# Altium PCB CarrierBoardreal.PcbDoc (part 1 of 2)
Units mm, origin at the board's own origin, x right, y up, seen from the top; angles counter-clockwise.
Board outline 78.61 x 85.6 mm, 2 copper layers (Top Layer, Bottom Layer), stack 1.6 mm thick; 58 components, 54 nets, 254 pads, 94 vias.
Unrouted connection lines stored in the file: 44.
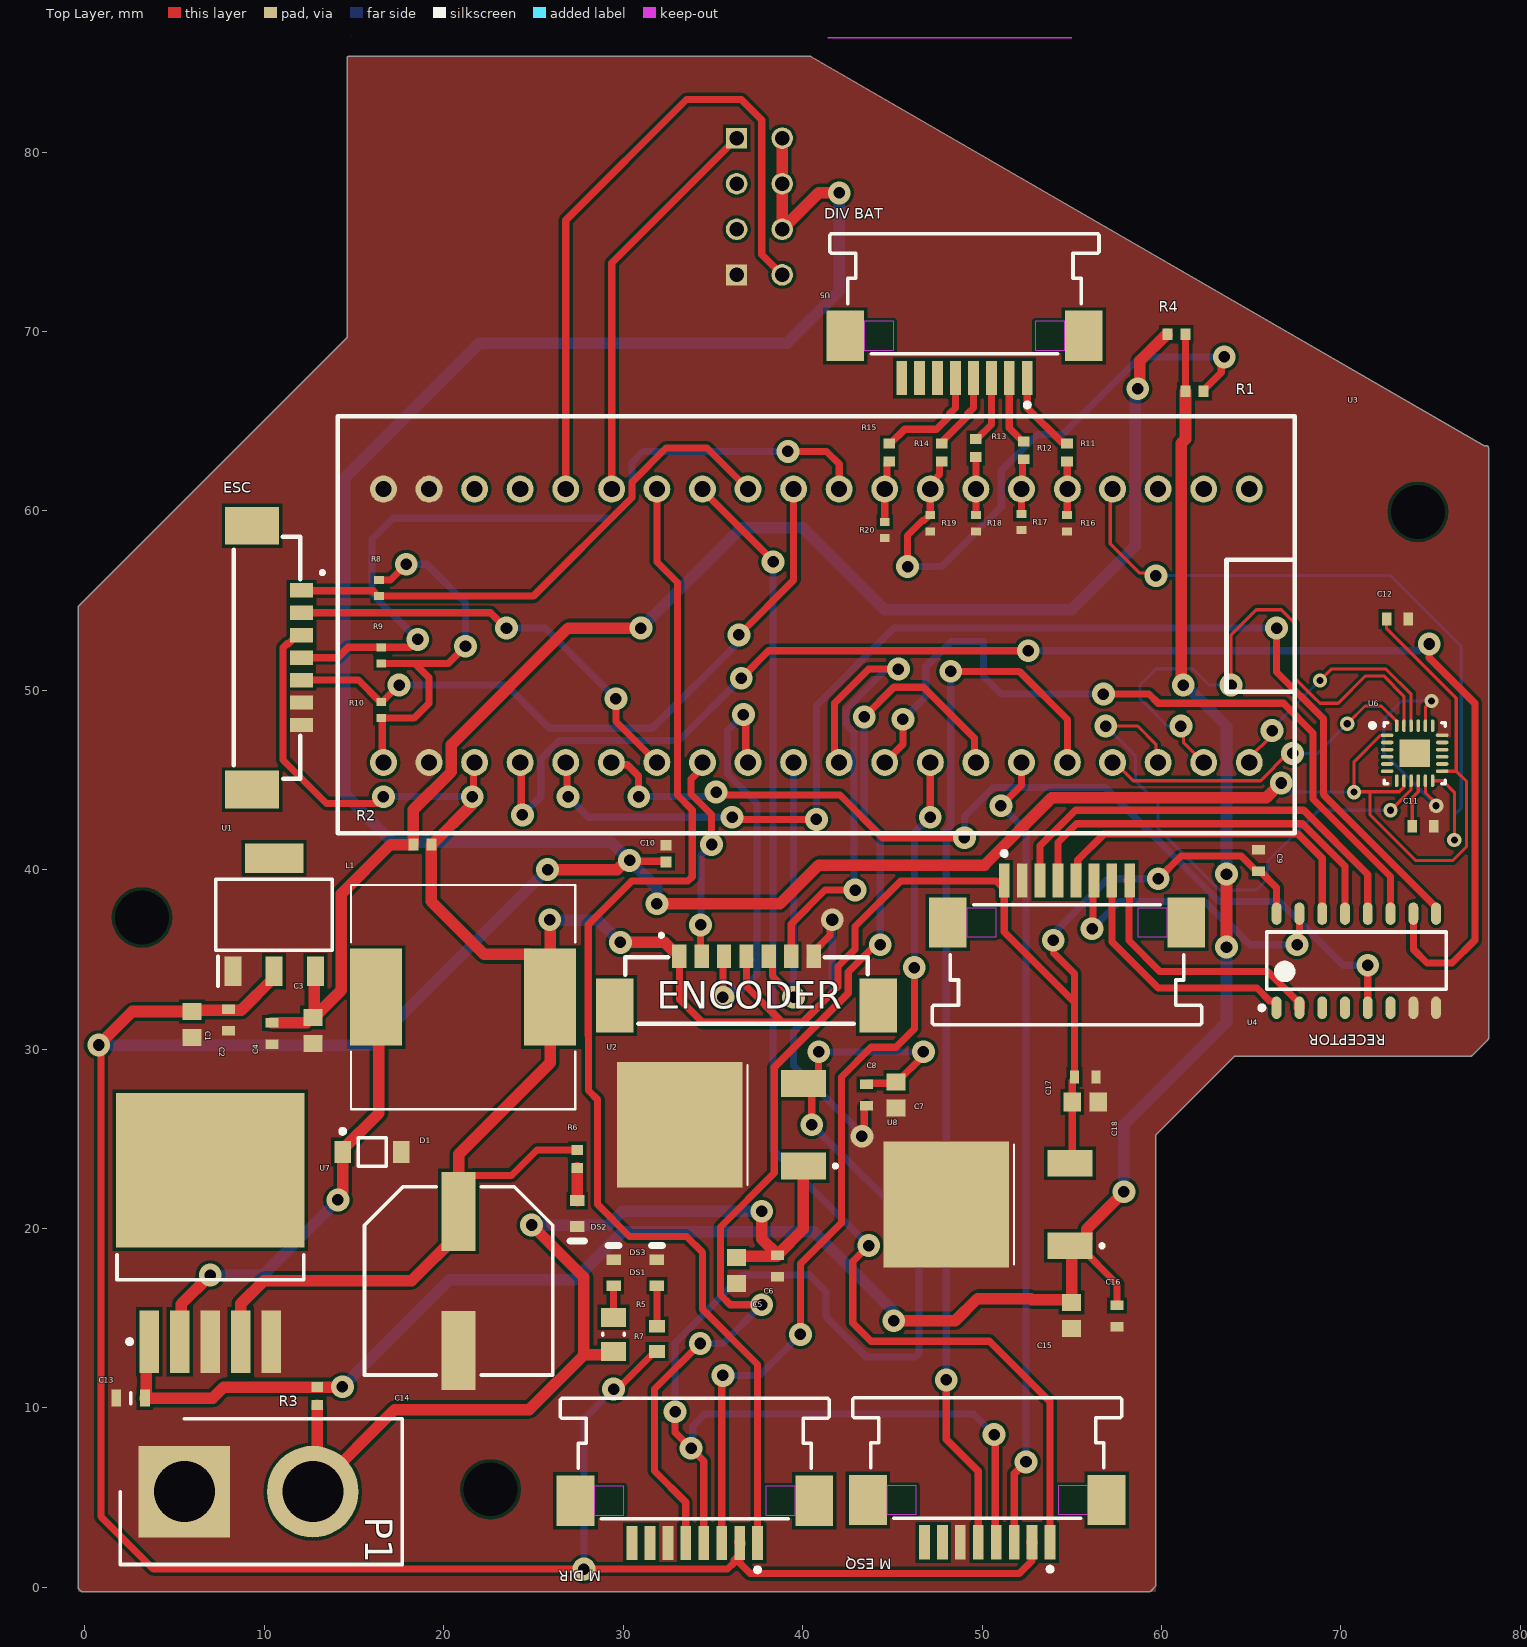
[diagram p0: Top Layer view]
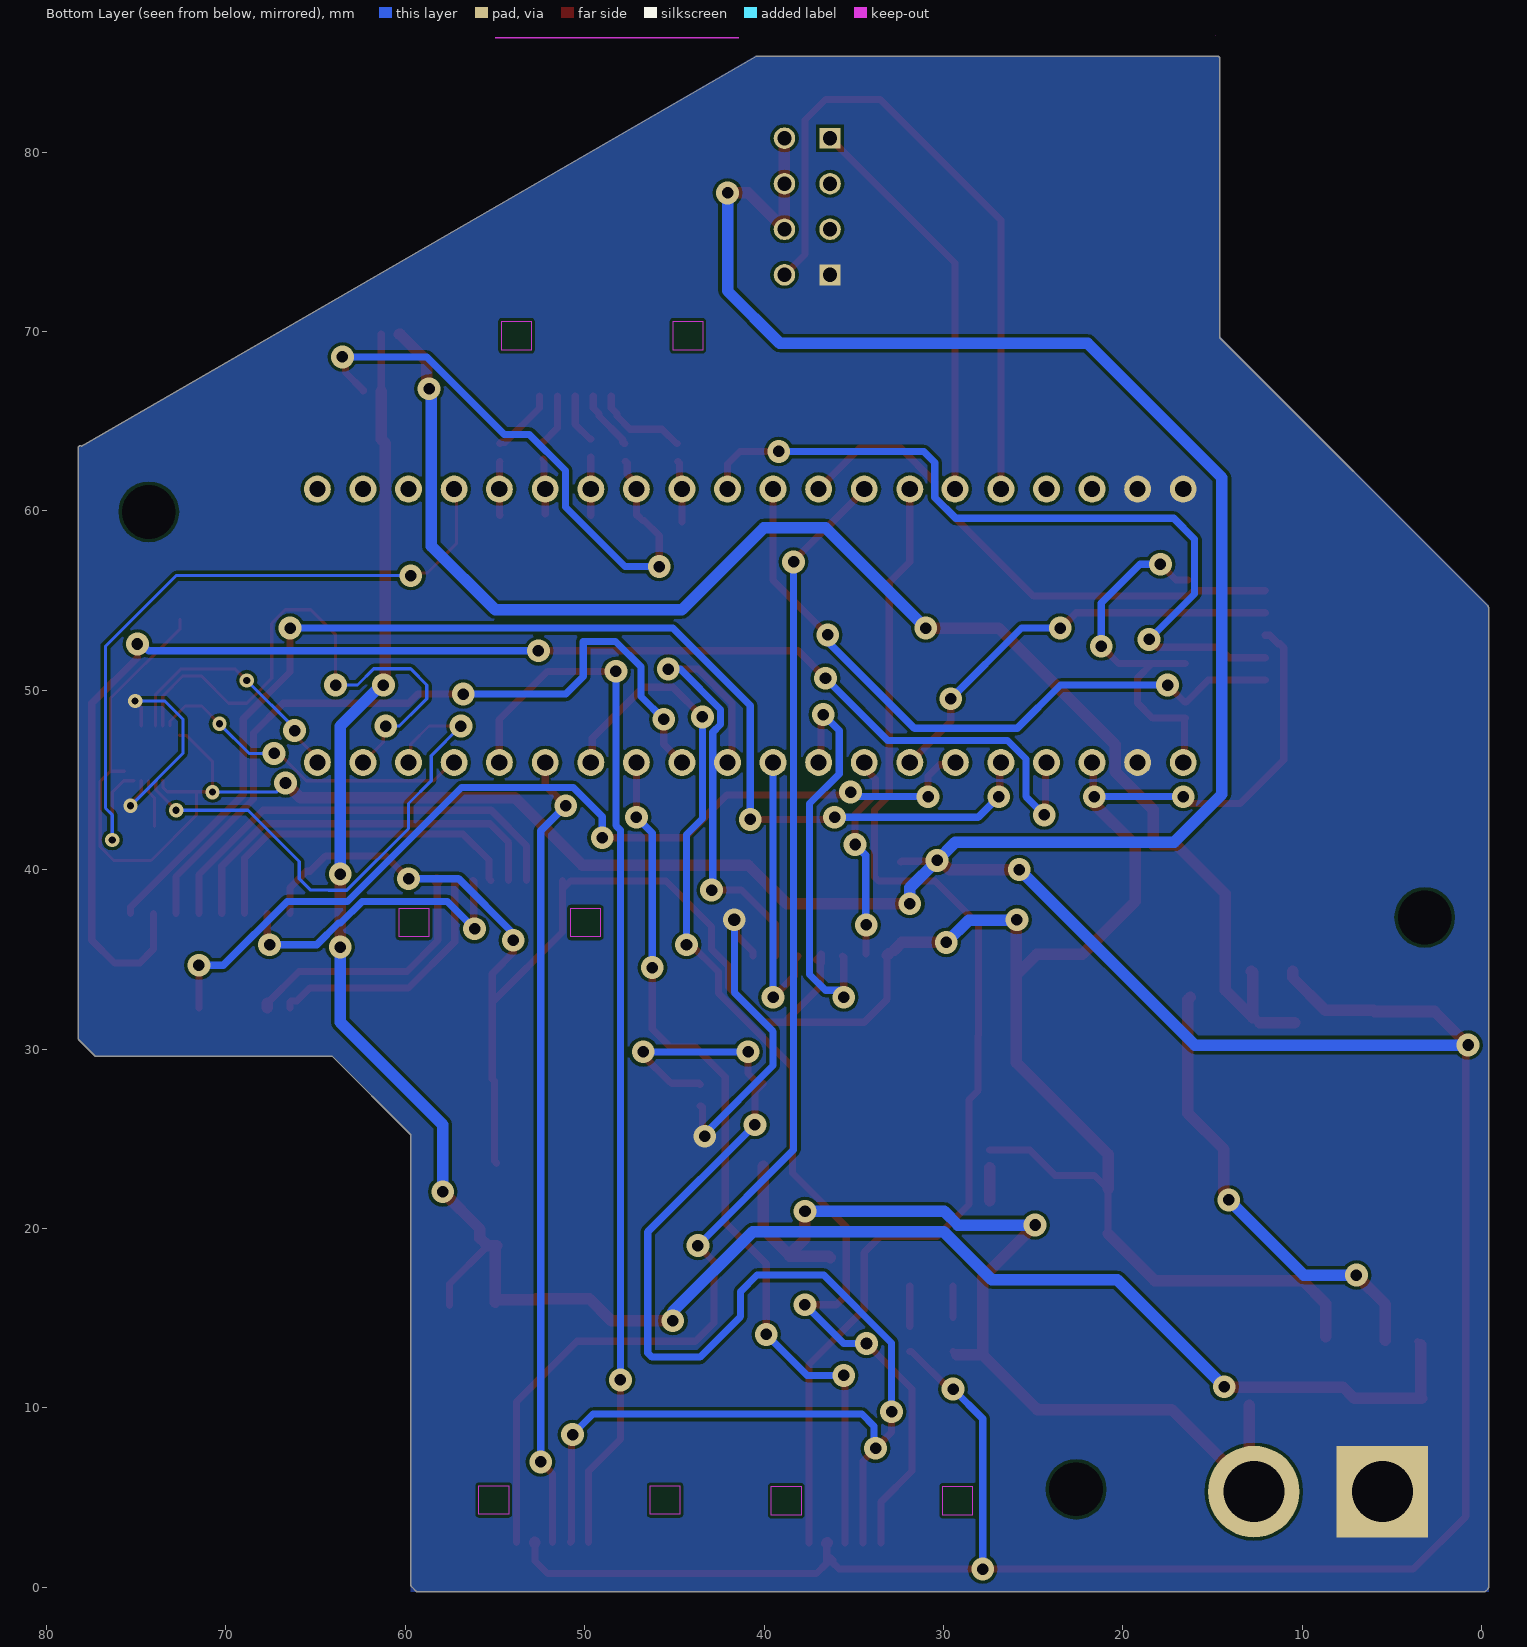
[diagram p1: Bottom Layer view, seen from below]

## Layer stack, top to bottom
Top Solder: solder mask 0.0102, Solder Resist, Dk 3.5
Top Layer: signal copper 0.0356
Dielectric 1: dielectric 1.5291, FR-4, Dk 4.8
Bottom Layer: signal copper 0.0356
Bottom Solder: solder mask 0.0102, Solder Resist, Dk 3.5

## Board outline
-0.344,-0.091 cw(c-0.254,0) -0.381,0 -0.381,54.61 cw(c-0.254,54.61) -0.344,54.701 -0.344,54.7 14.605,69.649 14.605,85.217 cw(c14.732,85.217) 14.795,85.327 cw(c14.859,85.217) 14.859,85.344 40.383,85.344 cw(c40.383,85.217) 40.447,85.327 78.04,63.609 cw(c78.105,63.5) 78.232,63.5 78.232,30.607 cw(c78.105,30.607) 78.195,30.516 78.195,30.517 77.306,29.628 77.307,29.628 cw(c77.216,29.718) 77.216,29.591 64.061,29.591 59.69,25.22 59.69,0.127 cw(c59.563,0.127) 59.653,0.036 59.653,0.037 59.399,-0.217 59.4,-0.217 cw(c59.309,-0.127) 59.309,-0.254 -0.127,-0.254 cw(c-0.127,-0.127) -0.218,-0.217 -0.217,-0.217
cut-out: 41.402,86.36
cut-out: 41.402,86.36 54.991,86.36
cut-out: 68.199,93.599
cut-out: 14.859,86.487

## Design rules (kind name [scope] priority, off if disabled: settings)
Clearance [All] p1: gap=0.178 ignorepadtopadclearanceinfootprint=FALSE
HoleSize [All] p1: absolutevalues=TRUE maxlimit=3.556 minlimit=0.025 maxpercent=80.000 minpercent=20.000
HoleToHoleClearance [All] p1: gap=0.178 allowstackedmicrovias=TRUE
MinimumSolderMaskSliver [All] p1: minsoldermaskwidth=0.114
PolygonConnect PolygonConnect_7 [All vs InNet('0')] p1: connectstyle=Direct reliefconductorwidth=0.254 reliefentries=4 polygonreliefangle="90 Angle" airgapwidth=0.254
PolygonConnect PolygonConnect_6 [All vs IsNamedPolygon('BOTTOM LAYER-GND')] p2: thpad.connectstyle=Direct thpad.reliefconductorwidth=0.254 thpad.reliefentries=4 thpad.polygonreliefangle="90 Angle" thpad.airgapwidth=0.254 smdpad.connectstyle=Direct smdpad.reliefconductorwidth=0.254 smdpad.reliefentries=4 smdpad.polygonreliefangle="90 Angle" smdpad.airgapwidth=0.254 via.connectstyle=Relief via.reliefconductorwidth=0.254 via.reliefentries=4 via.polygonreliefangle="90 Angle" via.airgapwidth=0.254
PolygonConnect PolygonConnect_5 [All vs IsNamedPolygon('BOTTOM LAYER-GND')] p3: connectstyle=Direct reliefconductorwidth=0.254 reliefentries=4 polygonreliefangle="90 Angle" airgapwidth=0.254
PolygonConnect PolygonConnect_4 [All vs IsNamedPolygon('TOP LAYER-GND')] p4: connectstyle=Direct reliefconductorwidth=0.254 reliefentries=4 polygonreliefangle="90 Angle" airgapwidth=0.254
PolygonConnect PolygonConnect_3 [All vs IsNamedPolygon('TOP LAYER-GND')] p5: thpad.connectstyle=Direct thpad.reliefconductorwidth=0.254 thpad.reliefentries=4 thpad.polygonreliefangle="90 Angle" thpad.airgapwidth=0.254 smdpad.connectstyle=Direct smdpad.reliefconductorwidth=0.254 smdpad.reliefentries=4 smdpad.polygonreliefangle="90 Angle" smdpad.airgapwidth=0.254 via.connectstyle=Relief via.reliefconductorwidth=0.254 via.reliefentries=4 via.polygonreliefangle="90 Angle" via.airgapwidth=0.254
PolygonConnect PolygonConnect_2 [All vs IsNamedPolygon('TOP LAYER-GND')] p6: thpad.connectstyle=Direct thpad.reliefconductorwidth=0.254 thpad.reliefentries=4 thpad.polygonreliefangle="90 Angle" thpad.airgapwidth=0.254 smdpad.connectstyle=Direct smdpad.reliefconductorwidth=0.254 smdpad.reliefentries=4 smdpad.polygonreliefangle="90 Angle" smdpad.airgapwidth=0.254 via.connectstyle=Relief via.reliefconductorwidth=0.254 via.reliefentries=4 via.polygonreliefangle="90 Angle" via.airgapwidth=0.254
PolygonConnect PolygonConnect_1 [All vs IsNamedPolygon('GND')] p7: connectstyle=Direct reliefconductorwidth=0.254 reliefentries=4 polygonreliefangle="90 Angle" airgapwidth=0.254
PolygonConnect [All] p8: connectstyle=Relief reliefconductorwidth=0.254 reliefentries=4 polygonreliefangle="90 Angle" airgapwidth=0.254
RoutingVias [All] p1: holewidth=0.4 width=0.797 viastyle="Through Hole" minholewidth=0.642 minwidth=1.27 maxholewidth=0.642 maxwidth=1.27
SilkToSolderMaskClearance [IsPad] p1: minsilkscreentomaskgap=0.084 clearancetoexposedcopper=TRUE
SolderMaskExpansion [All] p1: expansion=0.102
Width [All] p1: maxlimit=0.642 minlimit=0.178 preferedwidth=0.4 minimp=50.000000 maximp=50.000000 favimp=50.000000
26 further rules are at their usual default settings.

## Classes and differential pairs
component class Designator: C13 C14 C15 C16 C17 C18 D1 L1 U7 U8
component class CarrierBoard: C1 C2 C3 C4 C5 C6 C7 C8 DS1 DS2 DS3 P1 R1 R2 R3 R4 R5 R6 R7 U1 U2

## Components (designator, comment, footprint, x,y, rotation, side; value= is the part's Value field where it differs from the comment)
C1 "C1005X7R1H104K050BB" TDK-C1005-2_M 8.001,31.623 r90 top
C2 "1uF" CAPC1608X90X35ML10T15 5.969,31.369 r90 top
C3 "1uF" CAPC1608X90X35ML10T15 12.7,31.025 r90 top
C4 "C1005X7R1H104K050BB" TDK-C1005-2_M 10.414,30.861 r90 top
C5 "1uF" CAPC1608X90X35ML10T15 36.322,17.653 r90 top
C6 "C1005X7R1H104K050BB" TDK-C1005-2_M 38.608,17.907 r90 top
C7 "C1005X7R1H104K050BB" TDK-C1005-2_M 43.561,27.432 r90 top
C8 "1uF" CAPC1608X90X35ML10T15 45.212,27.432 r90 top
C9 "C1005X7R1H104K050BB" TDK-C1005-2_M 65.405,40.513 r270 top
C10 "10n" CAPC1005X55N 32.385,40.894 r90 top
C11 "C1005X7R1H104K050BB" TDK-C1005-2_M 74.584,42.418 r180 top
C12 "C1005X7R1H104K050BB" TDK-C1005-2_M 73.152,53.975 r180 top
C13 "C1608X5R1V335K080AC" CAPC1608X80N 2.54,10.541 r0 top
C14 "EEE-FK1H221P" PNSC-EEE-1HA221P_L 20.828,17.083 r270 top
C15 "1uF" CAPC1608X90X35ML10T15 54.991,15.15 r90 top
C16 "C1005X7R1H104K050BB" TDK-C1005-2_M 57.531,15.113 r90 top
C17 "C1005X7R1H104K050BB" TDK-C1005-2_M 55.753,28.448 r180 top
C18 "1uF" CAPC1608X90X35ML10T15 55.753,27.051 r180 top
D1 "MBR0540T1G" ONSC-SOD-123-2-425-04_V 16.002,24.257 r0 top
"DIV BAT" "52271-0879" MOLX-52271-0879 49.022,68.58 r180 top (schematic designator J6)
DS1 "TLMB1100-GS08" VISH-TLMX1100-2_V 29.464,17.526 r90 top
DS2 "TLMS1100-GS08" VISH-TLMX1100_V 27.432,20.828 r270 top
DS3 "TLMY1100-GS08" VISH-TLMX1100-2_V 31.877,17.526 r90 top
ENCODER "53398-0771" 53398-0771 30.12,35.111 r0 top
ESC "53398-0771" 53398-0771 11.997,58.566 r270 top
L1 "SRR1260-101M" *INDP125125X600N 21.082,32.893 r0 top
"M DIR" "52271-0879" MOLX-52271-0879 33.99,3.651 r180 top (schematic designator J7)
"M ESQ" "52271-0879" MOLX-52271-0879 50.292,3.683 r180 top (schematic designator J8)
P1 "VBAT5S" SHDR2W320P716_1X2_1574X813X1588P 5.537,5.334 r0 top
R1 "Jumper" RESC0402(1005)_N 61.841,66.675 r180 top value="0.00 Ohm"
R2 "Jumper" RESC0402(1005)_N 18.804,41.402 r180 top value="0.00 Ohm"
R3 "Jumper" RESC0402(1005)_N 12.954,10.66 r90 top value="0.00 Ohm"
R4 "Jumper" RESC0402(1005)_N 60.833,69.85 r180 top value="0.00 Ohm"
R5 "1K" RESC0805(2012)_N 29.464,14.097 r270 top value="1000.00 Ohm"
R6 "270R" RESC0402(1005)_N 27.432,23.876 r90 top value="270.00 Ohm"
R7 "220R" RESC1608X55X25NL10T15 31.877,13.843 r270 top
R8 "10K" RESC0402(1005)_L 16.383,55.695 r90 top value="10000.00 Ohm"
R9 "10K" RESC0402(1005)_L 16.51,51.943 r90 top value="10000.00 Ohm"
R10 "10K" RESC0402(1005)_L 16.51,48.895 r270 top value="10000.00 Ohm"
R11 "56K" RESC0402(1005)_N 54.737,63.246 r90 top value="56000.00 Ohm"
R12 "56K" RESC0402(1005)_N 52.324,63.373 r90 top value="56000.00 Ohm"
R13 "56K" RESC0402(1005)_N 49.657,63.5 r90 top value="56000.00 Ohm"
R14 "56K" RESC0402(1005)_N 47.752,63.246 r90 top value="56000.00 Ohm"
R15 "56K" RESC0402(1005)_N 44.831,63.246 r90 top value="56000.00 Ohm"
R16 "10K" RESC0402(1005)_L 54.737,59.309 r90 top value="10000.00 Ohm"
R17 "10K" RESC0402(1005)_L 52.197,59.378 r90 top value="10000.00 Ohm"
R18 "10K" RESC0402(1005)_L 49.657,59.309 r90 top value="10000.00 Ohm"
R19 "10K" RESC0402(1005)_L 47.117,59.309 r90 top value="10000.00 Ohm"
R20 "10K" RESC0402(1005)_L 44.577,58.928 r90 top value="10000.00 Ohm"
RECEPTOR "52271-0879" MOLX-52271-0879 54.737,38.227 r0 top (schematic designator J5)
U1 "LD1117S33CTR" SOT230P700X190-4N 10.541,37.49 r90 top
U2 "AS7815ADTR-G1" ZLDO1117K50TC 36.327,25.781 r90 top
U3 "Blue Pill" "blue pill" 70.993,64.988 r180 top
U4 "SN74LS151DR" D0016A_L 70.866,34.925 r90 top
U5 "ESP8266 Wifi module 01" ESP01 40.463,84.216 r180 top
U6 "MPU-9250" INSE-QFN-24-1700X1540TP_L 74.114,46.49 r0 top
U7 "LM2596SX-5.0/NOPB" TS5B_M 6.985,19.741 r90 top
U8 "AS7805ADTR-G1" ZLDO1117K50TC 51.186,21.336 r90 top

## Footprints (in the part's own frame and the unit in brackets; to place one, negate y for a bottom-side part, rotate by r counter-clockwise, add the part's x,y. Pads: shape width x height; smd on the part's side, far side on the other; paste and mask are expansions set on the pad)
53398-0771 [mm]
  rect 0.8x1.3 smd: 1(3,0.068) 2(4.25,0.068) 3(5.5,0.068) 4(6.75,0.068) 5(8,0.068) 6(9.25,0.068) 7(10.5,0.068)
  rect 2.1x3 smd: 8(-0.6,-2.682) 9(14.1,-2.682)
  silkscreen extent 0,-3.7 13.5,1.3
*INDP125125X600N [mm]
  rect 2.9x5.4 smd: 1(-4.85,0) 2(4.85,0)
  silkscreen extent -6.25,-6.25 6.25,6.25
"blue pill" [mm]
  round 1.5 hole 0.9: 1(6.096,3.774) 2(8.636,3.774) 3(11.176,3.774) 4(13.716,3.774) 5(16.236,3.774) 6(18.796,3.774) 7(21.336,3.774) 8(23.876,3.774) 9(26.416,3.774) 10(28.956,3.774) 11(31.496,3.774) 12(34.036,3.774) 13(36.576,3.774) 14(39.116,3.774) 15(41.636,3.774) 16(44.196,3.774) 17,(46.736,3.774) 18(49.276,3.774) 19(51.816,3.774) 20(54.356,3.774) 21(54.356,19.014) 22(51.816,19.014) 23(49.276,19.014) 24(46.736,19.014) 25(44.196,19.014) 26(41.656,19.014) 27(39.116,19.014) 28(36.576,19.014) 29(34.036,19.014) 30(31.496,19.014) 31(28.956,19.014) 32(26.416,19.014) 33(23.876,19.014) 34(21.336,19.014) 35(18.796,19.014) 36(16.236,19.014) 37(13.716,19.014) 38(11.176,19.014) 39(8.636,19.014) 40(6.096,19.014)
  silkscreen extent 3.56,-0.29 56.9,22.95, body extent 0.1,-0.04 57.66,22.82, height 9.77
CAPC1005X55N [mm]
  rect 0.6x0.62 smd: 1(-0.46,0) 2(0.46,0)
  body extent -0.5,-0.25 0.5,0.25, height 0.55
CAPC1608X80N [mm]
  rect 0.54x0.94 smd: 1(-0.8,0) 2(0.8,0)
  silkscreen extent 0,-0.3 0,0.3, body extent -0.8,-0.4 0.8,0.4, height 0.8
CAPC1608X90X35ML10T15 [mm] "Chip Capacitor, 2-Leads, Body 1.60x0.80mm, IPC Low Density"
  rect 0.95x1.05 smd: 1(-0.725,0) 2(0.725,0)
  body extent -0.85,-0.45 0.85,0.45, height 0.9
D0016A_L [mm] "SOIC, 16-Leads, Body 10x4mm, Pitch 1.27mm, IPC High Density"
  oval 1.25x0.55 smd: 1(-2.625,4.445) 2(-2.625,3.175) 3(-2.625,1.905) 4(-2.625,0.635) 5(-2.625,-0.635) 6(-2.625,-1.905) 7(-2.625,-3.175) 8(-2.625,-4.445) 9(2.625,-4.445) 10(2.625,-3.175) 11(2.625,-1.905) 12(2.625,-0.635) 13(2.625,0.635) 14(2.625,1.905) 15(2.625,3.175) 16(2.625,4.445)
  silkscreen extent -2.75,-5 1.6,5.39, body extent -3,-4.95 3,4.95, height 1.59
ESP01 [mil]
  round 47.25 / inner round 60 / far side round 47.25 hole 31.5: CH_PD(63.05,335.59) GPIO0(163.05,235.59) GPIO2(163.05,335.59) RST(63.05,235.59) TX(63.05,435.59) VCC(63.05,135.59)
  rect 45.75x45.75 / inner rect 60x60 / far side rect 45.75x45.75 hole 31.5: GND(163.05,435.59) RX(163.05,135.59)
  body extent 3,0 987,570, height 137
INSE-QFN-24-1700X1540TP_L [mm] "QFN, 24-Leads, Body 3.1x3.1mm, Pitch 0.40mm, Thermal Pad 1.54x1.70mm, IPC High Density"
  oval 0.7x0.2 smd: 1(-1.532,1) 2(-1.532,0.6) 3(-1.532,0.2) 4(-1.532,-0.2) 5(-1.532,-0.6) 6(-1.532,-1) 13(1.532,-1) 14(1.532,-0.6) 15(1.532,-0.2) 16(1.532,0.2) 17(1.532,0.6) 18(1.532,1)
  oval 0.2x0.7 smd: 7(-1,-1.532) 8(-0.6,-1.532) 9(-0.2,-1.532) 10(0.2,-1.532) 11(0.6,-1.532) 12(1,-1.532) 19(1,1.532) 20(0.6,1.532) 21(0.2,1.532) 22(-0.2,1.532) 23(-0.6,1.532) 24(-1,1.532)
  rect 1.7x1.54 smd: 25(0,0)
  silkscreen extent -2.47,-1.7 1.7,1.7, body extent -1.55,-1.55 1.55,1.55, height 1.05
MOLX-52271-0879 [mm] "FPC Connector, 8-Leads, Right Angle, Pitch 1.0 mm, Mated Height 3.0 mm, SMT"
  rect 0.6x1.9 smd: 1(-3.5,1.175) 2(-2.5,1.175) 3(-1.5,1.175) 4(-0.5,1.175) 5(0.5,1.175) 6(1.5,1.175) 7(2.5,1.175) 8(3.5,1.175)
  rect 2.1x2.8 smd: MP1(-6.65,-1.175) MP2(6.65,-1.175)
  Keep-Out Layer region: 3.95,-1.975 5.6,-1.975 5.6,-0.375 3.95,-0.375
  Keep-Out Layer region: -5.6,-1.975 -3.95,-1.975 -3.95,-0.375 -5.6,-0.375
  silkscreen extent -7.5,-6.87 7.5,2.8, body extent -7.5,-6.87 7.5,1.83, height 3.01
ONSC-SOD-123-2-425-04_V [mm] "SOD, 2-Leads, Body 2.69x1.6mm"
  rect 0.91x1.22 smd: 1(-1.635,0) 2(1.635,0)
  silkscreen extent -1.76,-0.8 0.78,1.28, body extent -1.35,-0.8 1.35,0.8, height 1.35
PNSC-EEE-1HA221P_L [mm] "Aluminum Electrolytic Capacitor, 2-Leads, Body 10.5x10.5mm, IPC High Density"
  rect 4.4x1.9 smd: 1(-3.875,0) 2(3.875,0)
  silkscreen extent -5.25,-5.25 5.25,5.25, body extent -5.36,-5.25 5.36,5.25, height 10.5
RESC0402(1005)_L [mm] "Chip Resistor, Body 1.0x0.5mm, IPC High Density"
  rect 0.45x0.55 smd: 1(-0.45,0) 2(0.45,0)
  body extent -0.52,-0.27 0.53,0.28, height 0.4
RESC0402(1005)_N [mm] "Chip Resistor, Body 1.0x0.5mm, IPC Medium Density"
  rect 0.55x0.65 smd: 1(-0.5,0) 2(0.5,0)
  body extent -0.52,-0.27 0.53,0.28, height 0.4
RESC0805(2012)_N [mm] "Chip Resistor, Body 2.0x1.3mm, IPC Medium Density"
  rect 1.05x1.4 smd: 1(-0.95,0) 2(0.95,0)
  silkscreen extent -0.05,-0.6 0.05,0.6, body extent -1.1,-0.67 1.1,0.68, height 0.7
RESC1608X55X25NL10T15 [mm] "Chip Resistor, 2-Leads, Body 1.60x0.80mm, IPC Medium Density"
  rect 0.7x0.9 smd: 1(-0.7,0) 2(0.7,0)
  body extent -0.85,-0.45 0.85,0.45, height 0.55
SHDR2W320P716_1X2_1574X813X1588P [mm]
  rect 5.1x5.1 hole 3.4: 1(0,0)
  round 5.1 hole 3.4: 2(7.163,0)
  silkscreen extent -3.58,-4.06 12.15,4.06
SOT230P700X190-4N [mm]
  rect 1.65x0.95 smd: 1(-3.15,2.3) 2(-3.15,0) 3(-3.15,-2.3)
  rect 1.65x3.25 smd: 4(3.15,0)
  silkscreen extent -3.97,-3.25 1.98,3.25
TDK-C1005-2_M [mm] "Chip Capacitor, 2-Leads, Body 1.05x0.55mm, IPC Low Density"
  rect 0.52x0.72 smd: 1(-0.6,0) 2(0.6,0)
  body extent -0.52,-0.28 0.53,0.27, height 0.55
TS5B_M [mm] "D2-PAK, 6-Leads, Body 8.6x10.2mm, Pitch 1.7mm, Lead Span 14.1mm, IPC Low Density"
  rect 3.5x1.1 smd: 1(-6.05,3.4) 2(-6.05,1.7) 3(-6.05,0) 4(-6.05,-1.7) 5(-6.05,-3.4)
  rect 8.6x10.5 smd: 6(3.5,0)
  silkscreen extent -6.17,-5.2 -1.2,5.2, body extent -2.6,-5.2 6.29,5.2, height 4.65
VISH-TLMX1100-2_V [mm] "SMD, 2-Leads, Body 1.6x0.8mm"
  rect 0.6x0.8 smd: 1(-0.725,0) 2(0.725,0)
  silkscreen extent 1.53,-0.3 1.53,0.3, body extent -0.8,-0.4 0.8,0.4, height 0.65
VISH-TLMX1100_V [mm] "SMD, 2-Leads, Body 1.6x0.8mm"
  rect 0.6x0.8 smd: 1(-0.725,0) 2(0.725,0)
  silkscreen extent 1.53,-0.4 1.53,0.4, body extent -0.8,-0.4 0.8,0.4, height 0.65
ZLDO1117K50TC [mm]
  rect 1.5x2.5 smd: 1(-2.3,-3.72) 3(2.3,-3.72)
  rect 7x7 smd: 2(0,3.18)
  silkscreen extent -3.35,-5.6 3.35,-0.6

## Part data
C1 C4 C6 C7 C9 C11 C12 C16 C17: library part CMP-2000-05393-1, "Chip Capacitor, 0.1 uF, +/- 10%, 50 V, -55 to 125 degC, 0402(1005 Metric), RoHS, Tape and Reel", Capacitance=0.1µF, Manufacturer=TDK, Operating Temperature=-55degC~125degC, Package / Case=0402(1005Metric), PCN Part Number=MLCCPartNumberChange30/Nov/2012, Ratings=-, Standard Package=1, Temperature Coefficient=X7R, Tolerance=±10%, Voltage - Rated=50V, Applications=GeneralPurpose, Category=Capacitors, Datasheet URL=http://www.farnell.com/datasheets/1913358.pdf, Datasheet Version=Mar-15, Family=CeramicCapacitors, Features=-, Height - Seated (Max)=-, Kits=445-9021-KIT-ND-KITMLCC100PF-10UF04026.3-50V445-9003-KIT-ND-KITCAPCERHICAPMLCCSMD, Lead Spacing=-, Lead Style=-, Manufacturer URL=http://www.tdk.com/, Mounting Type=SurfaceMount,MLCC, Online Catalog=CSeries,GeneralPurpose, Other Names=445-5932-1, Packaging=CutTape(CT), Product Training Modules=CSeriesGeneralApplicationsSEAT,CCV,andTVCLDesignToolsGuidetoReplacinganElectrolyticCapacitorwithanMLCC, RoHS Information=RoHSCertificate-MLCC, Series=C
C2 C3 C5 C8 C15 C18: library part CMP-2006-02823-1, "MURATA   GRM188R61H105KAALD   Multilayer Ceramic Capacitor, GRM Series, 1 F,  10%, X5R, 50 V, 0603 [1608 Metric]", Case/Package=0603, Case Code (Metric)=1608, Dielectric=X7R, Manufacturer=Murata, Manufacturer Part Number=GRM188R61H105KAALD, Max Operating Temperature=85°C, Min Operating Temperature=-55°C, Package Quantity=4000, Supplier Part Number 1=81-GRM188R61H105KALD, Tolerance=10%, Voltage=50V, Capacitance=1uF, Case Code (Imperial)=0603, ComponentLink1Description=http://www.farnell.com/datasheets/2048611.pdf?src-supplier=Newark, ComponentLink1URL=http://www.farnell.com/datasheets/2048611.pdf?src-supplier=Newark, ComponentLink2Description=http://www.farnell.com/datasheets/1747450.pdf?src-supplier=Element14, ComponentLink2URL=http://www.farnell.com/datasheets/1747450.pdf?src-supplier=Element14, ComponentLink3Description=https://www.distrelec.biz/Web/Downloads/_t/ds/murata_MLCC_eng_tds.pdf?mime=application%2Fpdf&src-supplier=Distrelec, ComponentLink3URL=https://www.distrelec.biz/Web/Downloads/_t/ds/murata_MLCC_eng_tds.pdf?mime=application%2Fpdf&src-supplier=Distrelec, Composition=Ceramic, Datasheet=https://br.mouser.com/datasheet/2/281/murata_03052018_GRM_Series_1-1310166.pdf, Depth=0.8mm, Height=0.8mm, Lead Free="Lead Free", Length=1.6mm, Material=Ceramic, Mount="Surface Mount", Packaging="Tape and Reel", Part Number=GRM188R61H105KAALD, Radiation Hardening=No, REACH SVHC="No SVHC", Stock 1=0, Supplier 1=Mouser, Termination=SMD/SMT, Thickness=0.035inch, Voltage Rating=50V, Voltage Rating (DC)=50V, Weight=0.000222oz, Width=0.8mm
C10: library part GRM155R71E103JA01J, "Capacitor", Capacitance=10nF, Case/Package=0402, Case Code (Metric)=1005, Dielectric=X7R, Manufacturer 1=Murata, Manufacturer_Name="Murata Electronics", Max Operating Temperature=125°C, Min Operating Temperature=-55°C, Mouser Part Number=81-GRM155R71E103JA1J, Package Quantity=50000, Supplier Part Number 1=490-6340-1-ND, Tolerance=5%, Voltage Rating=25V, Case Code (Imperial)=0402, ComponentLink1Description=https://datasheet.ciiva.com/5413/product-5413481.pdf?src-supplier=Mouser, ComponentLink1URL=https://datasheet.ciiva.com/5413/product-5413481.pdf?src-supplier=Mouser, ComponentLink2Description=https://datasheet.ciiva.com/6263/partnumbering-e-01-6263653.pdf?src-supplier=Digi-Key, ComponentLink2URL=https://datasheet.ciiva.com/6263/partnumbering-e-01-6263653.pdf?src-supplier=Digi-Key, ComponentLink3Description=https://datasheet.ciiva.com/6263/partnumbering-e-01-6263656.pdf?src-supplier=Digi-Key, ComponentLink3URL=https://datasheet.ciiva.com/6263/partnumbering-e-01-6263656.pdf?src-supplier=Digi-Key, ComponentLink4Description=https://datasheet.ciiva.com/6263/partnumbering-e-01-6263659.pdf?src-supplier=Digi-Key, ComponentLink4URL=https://datasheet.ciiva.com/6263/partnumbering-e-01-6263659.pdf?src-supplier=Digi-Key, ComponentLink5Description=https://datasheet.ciiva.com/11619/c02e-11619963.pdf?src-supplier=Avnet, ComponentLink5URL=https://datasheet.ciiva.com/11619/c02e-11619963.pdf?src-supplier=Avnet, Datasheet Link=http://www.murata.com/~/media/webrenewal/support/library/catalog/products/capacitor/mlcc/c02e.pdf, Depth=0.5mm, Height=0.55mm, Lead Free="Lead Free", Length=1mm, Manufacturer_Part_Number=GRM155R71E103JA01J, Manufacturer Part Number 1=GRM155R71E103JA01J, Mount="Surface Mount", Mouser Price/Stock=https://www.mouser.com/Search/Refine.aspx?Keyword=81-GRM155R71E103JA1J, Packaging="Tape and Reel", Pricing 1="1=0,10000, 10=0,03500, 100=0,01580, 500=0,01128, 1000=0,00886, 2500=0,00805, 5000=0,00741 (USD)", Radiation Hardening=No, RoHS=Yes, Stock 1=414697, Supplier 1=Digi-Key, Termination=SMD/SMT, Thickness=0.022inch, Voltage Rating (DC)=25V, Width=0.02inch
C13: "Capacitor 3.3uF", Capacitance=3.3uF, Case/Package=0603, Case Code (Metric)=1608, Dielectric=X5R, Dielectric Material=Ceramic, Manufacturer=TDK, Max Operating Temperature=85°C, Min Operating Temperature=-55°C, Mouser Part Number=810-C1608X5R1V335KAC, Package Quantity=4000, Supplier Part Number 1=445-14167-1-ND, Tolerance=10%, Voltage Rating=35V, Case Code (Imperial)=0603, ComponentLink1Description=https://datasheet.ciiva.com/14909/tdkmlcccaprange-14909925.pdf?src-supplier=Digi-Key, ComponentLink1URL=https://datasheet.ciiva.com/14909/tdkmlcccaprange-14909925.pdf?src-supplier=Digi-Key, ComponentLink2Description=https://datasheet.ciiva.com/14909/tdkmlcccaprange-14909926.pdf?src-supplier=Digi-Key, ComponentLink2URL=https://datasheet.ciiva.com/14909/tdkmlcccaprange-14909926.pdf?src-supplier=Digi-Key, Datasheet Link=https://product.tdk.com/info/en/catalog/datasheets/mlcc_commercial_midvoltage_en.pdf, Height=0.8mm, Lead Free="Lead Free", Length=0.063inch, Manufacturer_Name=TDK, Manufacturer_Part_Number=C1608X5R1V335K080AC, Manufacturer Part Number=C1608X5R1V335K080AC, Mount="Surface Mount", Mouser Price/Stock=https://www.mouser.com/Search/Refine.aspx?Keyword=810-C1608X5R1V335KAC, Packaging="Tape and Reel", Pricing 1="1 = 0,45000, 10 = 0,31100, 100 = 0,18630, 500 = 0,13972, 1000 = 0,11799 (USD)", RoHS=Yes, Stock 1=4798, Supplier 1=Digi-Key, Termination=SMD/SMT, Thickness=0.035inch, Voltage Rating (DC)=35V, Weight=7.1E-05oz, Width=0.8mm
C14: library part CMP-2000-06200-1, "Aluminum Electrolytic Capacitor, 220 uF, +/- 20%, 50 V, -40 to 85 degC, 2-Pin SMD, RoHS, Tape and Reelhttps://br.mouser.com/ProductDetail/Panasonic/EEE-FK1H221P?qs=%2Fha2pyFaduioJWBrqH8qNcijPCQSw77%252BpLytlHuDdeup2lEE5e2lgA%3D%3D", AE Capacitor Case=RadialCan-SMD, Capacitance=220µF, Capacitance Tolerance=±20%, Life Time @ Temperature=2000hours@85°C, Manufacturer=Panasonic, Operating Temperature Max=85°C, Operating Temperature Min=-40°C, Package Description="2-Pin Surface Mount Device, Body 10.3 x 10.3 mm", Package Reference=SMD, Ripple Current AC=300mA, Voltage Rating=50V, Capacitance Tolerance ±=±20%, Capacitor Case Style=RadialCan-SMD, Datasheet URL=https://br.mouser.com/datasheet/2/315/ABA0000C1181-947564.pdf, Datasheet Version=11/2012, Diameter=10mm, Height=10.2mm, Lifetime @ Temperature=2000hours@85°C, Manufacturer URL=http://www.panasonic.com/, Mounting Technology=SurfaceMount, Packaging=CutTape, Product Range=PANASONIC-SSeries, SVHC=ToBeAdvised
D1: library part CMP-1055-00401-1, "Schottky Power Rectifier, 2-Pin SOD-123, Pb-Free, Tape and Reel", Manufacturer="On Semiconductor", ComponentLink1Description="Manufacturer URL", ComponentLink1URL=http://www.onsemi.com/, ComponentLink2Description=Datasheet, ComponentLink2URL=http://www.onsemi.cn/pub_link/Collateral/MBR0540T1-D.PDF, ComponentLink3Description="Package Specification", ComponentLink3URL=http://www.onsemi.com/pub_link/Collateral/425-04.PDF, Configuration=Single, Datasheet=https://br.mouser.com/datasheet/2/315/ABA0000C1181-947564.pdf, DatasheetVersion="Rev. 7", IFSM Max (A)=5.5, Mounting Technology="Surface Mount", PackageDescription="2-Pin SOD, Body 1.6 x 2.69 mm", PackageReference=SOD-123-2-425-04, PackageVersion="Rev. G, 10/2009", Packing="Tape and Reel", PartNumber=MBR0540T1G, RoHS=TRUE
"DIV BAT" "M DIR" "M ESQ" RECEPTOR: library part CMP-1241-00231-1, "1.0 mm Pitch Easy-On(TM) Type FPC Connector, 3.0 mm Mated Height, Right Angle, ZIF, SMT, Bottom Contact, 8 Circuits, -40 to 85 degC, ELV and RoHS Compliant, Tape and Reel", Current (Max per Contact)=0.5A, Manufacturer=Molex, Voltage (Max)="50V AC (RMS)/DC", Circuits (Loaded)=8, ComponentLink1Description="Manufacturer URL", ComponentLink1URL=http://www.molex.com/molex/index.jsp, ComponentLink2Description=Datasheet, ComponentLink2URL=http://www.molex.com/webdocs/datasheets/pdf/en-us/0522710879_FFC_FPC_CONNECTORS.pdf, ComponentLink3Description="Package Specification", ComponentLink3URL=http://www.molex.com/pdm_docs/sd/522710879_sd.pdf, Contact Position=Bottom, Durability (mating cycles max)=30, Entry Angle="90degrees Angle", Mated Height=3.00mm, Material - Metal="Phosphor Bronze", Material - Plating Mating=Tin-Bismuth, Material - Plating Termination=Tin-Bismuth, Mounting Technology="Surface Mount", Number of Rows=1, Orientation="Right Angle", PackageDescription="8-Lead FPC Connector, Pitch 1.0 mm", PackageReference=52271-0879, PackageVersion="Rev. B, 04/2004", Packing="Tape and Reel", PartNumber=52271-0879, PCB Locator=No, PCB Retention=Yes, Pitch - Mating Interface=1.00mm, Pitch - Termination Interface=1.00mm, Polarized to PCB=Yes, RoHS=TRUE, Stackable=No
DS1: library part CMP-1666-00028-1, "Blue LED, 10 mA, 3.9 V, -40 to 100 degC, 2-Pin SMD (0603), RoHS, Tape and Reel                  TLMB1100-GS08", Capacitance="10 nF", Case\Package=Radial, Max Operating Temperature="125 degC", Min Operating Temperature="-55 degC", Package Quantity=500, Tolerance=10%, Type (Capacitors)=X7R, Voltage Rating="100 V", ComponentLink1Description="Manufacturer URL", ComponentLink1URL=http://www.vishay.com/, ComponentLink2Description=Datasheet, ComponentLink2URL=http://download.siliconexpert.com/pdfs/2016/8/7/12/43/26/667/vsh_/manual/379263299541529tlmb1100.pdf, DatasheetVersion="Rev. 2.7, 03/2016", Height="2.54 mm", Lead Pitch="2.54 mm", Length="5.33 mm", Mount="Through Hole", PackageDescription="2-Pin Surface Mount Device, Body 1.6 x 0.8 mm", PackageReference=0603, Packaging=Bulk, Pins=2, Radiation Hardening=No, REACH SVHC="No SVHC", RoHSCompliant=true, Width="3.81 mm"
DS2: library part CMP-1666-00027-1, "LED, RED, 2.1 V, -40 to 100 degC, 2-Pin SMD (0603), RoHS, Tape and Reel", Capacitance="12 pF", Case/Package=0603, Case Code (Metric)=1608, Max Operating Temperature=125degC, Min Operating Temperature=-55degC, Package Quantity=4000, Resistance="100000000000 Ohm", Tolerance=5%, Type (Capacitors)=C0G, Voltage Rating="50 V", Case Code (Imperial)=0603, ComponentLink1Description="Manufacturer URL", ComponentLink1URL=http://www.vishay.com/, ComponentLink2Description=Datasheet, ComponentLink2URL=http://www.vishay.com/docs/83173/tlmb1100.pdf, DatasheetVersion="Rev. 2.7, 03/2016", Height="0.8 mm", Length="1.6 mm", Mount="Surface Mount", PackageDescription="2-Pin Surface Mount Device, Body 1.6 x 0.8 mm", PackageReference=TLMX1100, Packaging="Tape and Reel", Pins=2, Radiation Hardening=No, REACH SVHC="No SVHC", RoHSCompliant=True, Voltage Rating (DC)="50 V", Width="0.8 mm"
DS3: library part CMP-1666-00030-1, "Yellow LED, 20 mA, 2.1 V, -40 to 100 degC, 2-Pin SMD (0603), RoHS, Tape and Reel             TLMY1100-GS08", ComponentLink1Description="Manufacturer URL", ComponentLink1URL=http://www.vishay.com/, ComponentLink2Description=Datasheet, ComponentLink2URL=http://download.siliconexpert.com/pdfs/2016/8/7/12/43/26/667/vsh_/manual/379263299541529tlmb1100.pdf, DatasheetVersion="Rev. 2.7, 03/2016", PackageDescription="2-Pin Surface Mount Device, Body 1.6 x 0.8 mm", PackageReference=0603
ENCODER ESC: "7 way SMT straight header Molex PICOBLADE Series, Series Number 53398, 1.25mm Pitch 7 Way 1 Row Straight PCB Header, Solder Termination, 1A", Manufacturer_Name=Molex, RS Part Number=5427220P, Allied_Number=70373150, Allied Price/Stock=http://www.alliedelec.com/molex-incorporated-53398-0771/70373150/, Arrow Part Number=53398-0771, Arrow Price/Stock=http://uk.rs-online.com/web/p/products/5427220P, Datasheet Link=http://www.molex.com/webdocs/datasheets/pdf/en-us/0533980771_PCB_HEADERS.pdf, Manufacturer_Part_Number=53398-0771, RS Price/Stock=http://uk.rs-online.com/web/p/products/5427220P
L1: library part SRR1260-220M, "FIXED IND 100UH 1.7A 180 MOHM", Case/Package=1260, Current Rating=1.7A, DC Resistance (DCR)=180mR, Frequency=6.07MHz, Inductance=100uH, Inductance Tolerance=20%, Manufacturer=Bourns, Max Operating Temperature=125°C, Min Operating Temperature=-40°C, Mouser Part Number=652-SRR1260-220M, Package Quantity=600, Resistance=180MR, RS Part Number=7272246P, Supplier Part Number 1=652-SRR1260-101M, Test Frequency=100kHz, Allied_Number=70277063, Allied Price/Stock=https://www.alliedelec.com/bourns-srr1260-220m/70277063/, ComponentLink1Description=http://www.bourns.com/docs/Product-Datasheets/SRR1260.pdf?src-supplier=Digi-Key, ComponentLink1URL=http://www.bourns.com/docs/Product-Datasheets/SRR1260.pdf?src-supplier=Digi-Key, ComponentLink2Description=http://uk.rs-online.com/webdocs/0def/0900766b80defded.pdf?src-supplier=RSComponents, ComponentLink2URL=http://uk.rs-online.com/webdocs/0def/0900766b80defded.pdf?src-supplier=RSComponents, ComponentLink3Description=http://www.farnell.com/datasheets/1430852.pdf?src-supplier=Element14, ComponentLink3URL=http://www.farnell.com/datasheets/1430852.pdf?src-supplier=Element14, ComponentLink4Description=http://www.farnell.com/datasheets/1914016.pdf?src-supplier=Element14, ComponentLink4URL=http://www.farnell.com/datasheets/1914016.pdf?src-supplier=Element14, ComponentLink5Description=http://www.bourns.com/pdfs/SRR1260.pdf?src-supplier=Avnet, ComponentLink5URL=http://www.bourns.com/pdfs/SRR1260.pdf?src-supplier=Avnet, ComponentLink6Description=http://www.farnell.com/datasheets/2366825.pdf?src-supplier=Newark, ComponentLink6URL=http://www.farnell.com/datasheets/2366825.pdf?src-supplier=Newark, ComponentLink7Description=https://www.alliedelec.com/m/d/845565468e1e76a1db638ca94afd232b.pdf?src-supplier=Allied+Electronics, ComponentLink7URL=https://www.alliedelec.com/m/d/845565468e1e76a1db638ca94afd232b.pdf?src-supplier=Allied+Electronics, Composition=Wirewound, Core Material=Ferrite, Datasheet Link=https://componentsearchengine.com/Datasheets/2/SRR1260-220M.pdf, DC Current=1.7A, Depth=12.8mm, Height=6mm, Height - Seated (Max)=0.256inch, Length=12.5mm, Manufacturer_Name=Bourns, Manufacturer_Part_Number=SRR1260-220M, Manufacturer Part Number=SRR1260-101M, Material=Steel, Max DC Current=1.7A, Military Standard=Not, Mount="Surface Mount", Mouser Price/Stock=https://www.mouser.com/Search/Refine.aspx?Keyword=652-SRR1260-220M, Number of Pins=2, Packaging="Tape and Reel", Pricing 1="1=0.97, 10=0.833, 50=0.694, 100=0.652, 1000=0.447, 10000=0.446 (USD)", Q Factor=26, REACH SVHC="No SVHC", RMS Current (Irms)=1.7A, RS Price/Stock=http://uk.rs-online.com/web/p/products/7272246P, Saturation Current=1.7A, Self Resonant Frequency=6.07MHz, Shielding=Shielded, Stock 1=6993, Supplier 1=Mouser, Termination=SMD/SMT, Tolerance=20%, Width=12.5mm
P1: library part PRT-10474, "Connector", Manufacturer_Name=SparkFun, Mouser Part Number=474-PRT-10474, Datasheet Link=http://cdn.sparkfun.com/datasheets/Prototyping/xt60.pdf, Height=15.875mm, Manufacturer_Part_Number=PRT-10474, Mouser Price/Stock=https://www.mouser.com/Search/Refine.aspx?Keyword=474-PRT-10474
R1 R2 R3 R4: library part CMP-1011-00001-1, "Jumper 0402 (1005 Metric)", Case-EIA=0402, Case-Metric=1005, Manufacturer=Vishay, Manufacturer Part Number=CRCW04020000Z0ED, Max Operating Temperature=155°C, Max Power Dissipation=63mW, Min Operating Temperature=-55°C, Package Quantity=1, Power=None, Resistance=0mR, Supplier Part Number 1=71-CRCW0402-0-E3, Temperature Coefficient=100ppm/°C, Voltage Rating=50V, Case/Package=0402, Case Code (Imperial)=0402, Case Code (Metric)=1005, ComponentLink1Description=http://www.vishay.com/docs/20035/dcrcwe3.pdf?src-supplier=Avnet+Europe, ComponentLink1URL=http://www.vishay.com/docs/20035/dcrcwe3.pdf?src-supplier=Avnet+Europe, ComponentLink2Description=http://www.vishay.com/docs/20035/dcrcwe3.pdf?src-supplier=Avnet, ComponentLink2URL=http://www.vishay.com/docs/20035/dcrcwe3.pdf?src-supplier=Avnet, ComponentLink3Description=http://www.vishay.com/docs/20035/dcrcwe3.pdf?src-supplier=Digi-Key, ComponentLink3URL=http://www.vishay.com/docs/20035/dcrcwe3.pdf?src-supplier=Digi-Key, ComponentLink4Description=http://www.farnell.com/datasheets/2111203.pdf?src-supplier=Element14, ComponentLink4URL=http://www.farnell.com/datasheets/2111203.pdf?src-supplier=Element14, ComponentLink5Description=http://www.vishay.com/docs/20035/dcrcwe3.pdf?src-supplier=Allied+Electronics, ComponentLink5URL=http://www.vishay.com/docs/20035/dcrcwe3.pdf?src-supplier=Allied+Electronics, ComponentLink6Description=https://www.distrelec.biz/Web/Downloads/a_/en/flD-CRCW-e3_data_en.pdf?mime=application%2Fpdf&src-supplier=Distrelec, ComponentLink6URL=https://www.distrelec.biz/Web/Downloads/a_/en/flD-CRCW-e3_data_en.pdf?mime=application%2Fpdf&src-supplier=Distrelec, Composition="Thick Film", Contact Plating=Tin, Depth=0.5mm, Features="Automotive AEC-Q200", Height=0.35mm, Lead Free="Lead Free", Length=1mm, Military Standard=Not, Mount="Surface Mount", Number of Terminations=2, Packaging="Tape and Reel", Power Rating=63mW, Pricing 1="1=0.1, 10=0.017, 50=0.017, 100=0.007, 1000=0.005, 10000=0.004 (USD)", Radiation Hardening=No, REACH SVHC=Unknown, Stock 1=1223713, Supplier 1=Mouser, Technology=SMT, Termination=SMD/SMT, Tolerance=None, Voltage Rating (DC)=50V, Weight=2.3E-05oz, Width=0.5mm
R5: library part CMP-1013-00074-1, "1K 0.125W 5% 0805 (2012 Metric)  SMD", Case-EIA=0805, Case-Metric=2012, Manufacturer=Yageo, Manufacturer Part Number=RC0805JR-071KL, Max Operating Temperature=155°C, Min Operating Temperature=-55°C, Power="0.125 W", Power Rating=125mW, Resistance=1kR, Supplier Part Number 1=603-RC0805JR-071KL, Temperature Coefficient=100ppm/°C, Tolerance="5 %", Voltage Rating=150V, Case/Package=0805, Case Code (Imperial)=0805, Case Code (Metric)=2012, ComponentLink1Description=http://www.farnell.com/datasheets/2167052.pdf?src-supplier=Verical, ComponentLink1URL=http://www.farnell.com/datasheets/2167052.pdf?src-supplier=Verical, ComponentLink2Description=http://www.farnell.com/datasheets/2167052.pdf?src-supplier=Mouser, ComponentLink2URL=http://www.farnell.com/datasheets/2167052.pdf?src-supplier=Mouser, ComponentLink3Description=http://www.farnell.com/datasheets/442941.pdf?src-supplier=Element14, ComponentLink3URL=http://www.farnell.com/datasheets/442941.pdf?src-supplier=Element14, ComponentLink4Description=http://www.farnell.com/datasheets/444164.pdf?src-supplier=Element14, ComponentLink4URL=http://www.farnell.com/datasheets/444164.pdf?src-supplier=Element14, Composition="Thick Film", Contact Plating=Tin,Lead,Matte, Depth=1.25mm, Lead Free="Lead Free", Length=2mm, Military Standard=Not, Packaging="Tape and Reel", Pricing 1="1=0.11, 10=0.026, 50=0.026, 100=0.009, 1000=0.007, 10000=0.004 (USD)", Radiation Hardening=No, REACH SVHC=Unknown, Stock 1=1222072, Supplier 1=Mouser, Technology=SMT, Termination=SMD/SMT
R6: library part CMP-1011-00060-1, "270R 0.063W 5% 0402 (1005 Metric)  SMD                             603-AC0402JR-07270RL", Case-EIA=0402, Case-Metric=1005, Manufacturer=Yageo, Manufacturer Part Number=AC0402JR-07270RL, Max Operating Temperature=155°C, Max Power Dissipation=63mW, Min Operating Temperature=-55°C, Power="0.063 W", Supplier Part Number 1=603-AC0402JR-07270RL, Temperature Coefficient=100ppm/°C, Tolerance="5 %", Case/Package=0402, Case Code (Imperial)=0402, Case Code (Metric)=1005, Composition="Thick Film", Features="Moisture Resistant,Automotive AEC-Q200", Height=0.015inch, Length=0.039inch, Number of Terminations=2, Packaging="Tape and Reel", Pricing 1="1=0.1, 10=0.015, 50=0.015, 100=0.005, 1000=0.004, 10000=0.004 (USD)", Resistance=270R, Stock 1=82259, Supplier 1=Mouser, Technology=SMT, Width=0.02inch
R7: library part CMP-2000-04878-1, "Res 0603 220 Ohm 5% 0.1W(1/10W) ±100ppm/C Sulfur Resistant Pad SMD Automotive T/R", Case/Package=0603, Manufacturer=Yageo, Manufacturer Part Number 1=AF0603JR-07220RL, Max Operating Temperature=155°C, Max Power Dissipation=100mW, Min Operating Temperature=-55°C, Part Number=AF0603FR-07130RL, Supplier Part Number 1=603-AF0603JR-07220RL, Temperature Coefficient=100ppm/°C, Tolerance=5%, ComponentLink1Description=http://www.yageo.com/documents/recent/PYu-AF_51_RoHS_L_5.pdf?src-supplier=Digi-Key, ComponentLink1URL=http://www.yageo.com/documents/recent/PYu-AF_51_RoHS_L_5.pdf?src-supplier=Digi-Key, Composition="Thick Film", Features="Moisture Resistant", Height=0.022inch, Lead Free="Lead Free", Length=0.063inch, Manufacturer 1=Yageo, Number of Terminations=2, Packaging="Tape and Reel", Pricing 1="1=0,12000, 10=0,02700, 50=0,02700, 100=0,00900, 1000=0,00800, 10000=0,00500 (USD)", Resistance=220R, RoHS=Yes, Stock 1=9358, Supplier 1=Mouser, Width=0.031inch
R8 R9 R10 R16 R17 R18 R19 R20: library part CMP-1011-00623-1, "10K 0.063W 1% 0402 (1005 Metric)  SMD", Case-EIA=0402, Case-Metric=1005, Case/Package=Molded, Manufacturer=Vishay, Manufacturer Part Number=ERJ-2RKF1002X, Max Operating Temperature=155°C, Min Operating Temperature=-55°C, Power="0.063 W", Power Rating=62.5mW, Resistance=10kR, Supplier Part Number 1=71-CRCW040210K0FKEDC, Temperature Coefficient=100ppm/°C, Tolerance="1 %", Composition="Thick Film", Contact Plating=Tin, Lead Free="Lead Free", Length=1mm, Mount="Surface Mount", Pricing 1="1=0.13, 10=0.051, 50=0.051, 100=0.029, 1000=0.029, 10000=0.005 (USD)", Stock 1=1778155, Supplier 1=Mouser, Technology=SMT, Termination=Wraparound
R11 R12 R13 R14 R15: library part CMP-1011-00708-1, "56K 0.063W 1% 0402 (1005 Metric)  SMD", Case-EIA=0402, Case-Metric=1005, Manufacturer=Bourns, Manufacturer Part Number=CR0402-FX-5602GLF, Max Operating Temperature=125°C, Max Power Dissipation=63mW, Min Operating Temperature=-55°C, Package Quantity=1, Power="0.063 W", Power Rating=62.5mW, Resistance=56kR, Supplier Part Number 1=652-CR0402FX-5602GLF, Temperature Coefficient=100ppm/°C, Tolerance="1 %", Voltage Rating=50V, Case/Package=0402, Case Code (Imperial)=0402, Case Code (Metric)=1005, ComponentLink1Description=https://www.bourns.com/docs/Product-Datasheets/CR0402.pdf?src-supplier=Digi-Key, ComponentLink1URL=https://www.bourns.com/docs/Product-Datasheets/CR0402.pdf?src-supplier=Digi-Key, ComponentLink2Description=http://www.bourns.com/pdfs/CR0402.pdf?src-supplier=Avnet, ComponentLink2URL=http://www.bourns.com/pdfs/CR0402.pdf?src-supplier=Avnet, Composition="Thick Film", Contact Plating=Tin, Depth=0.5mm, Height=0.016inch, Length=1mm, Military Standard=Not, Mount="Surface Mount", Number of Terminations=2, Packaging="Tape and Reel", Pricing 1="1=0.1, 10=0.022, 50=0.022, 100=0.013, 1000=0.008, 10000=0.005 (USD)", Radiation Hardening=No, Stock 1=37564, Supplier 1=Mouser, Technology=SMT, Termination=SMD/SMT, Thickness=356um, Width=0.5mm
U1: "Integrated Circuit", Manufacturer_Name=STMicroelectronics, Mouser Part Number=511-LD1117S33C, RS Part Number=1657750, Allied_Number=70390200, Allied Price/Stock=http://www.alliedelec.com/stmicroelectronics-ld1117s33ctr/70390200/, Datasheet Link=http://www.st.com/st-web-ui/static/active/en/resource/technical/document/datasheet/CD00000544.pdf, Height=1.9mm, Manufacturer_Part_Number=LD1117S33CTR, Mouser Price/Stock=https://www.mouser.com/Search/Refine.aspx?Keyword=511-LD1117S33C, RS Price/Stock=http://uk.rs-online.com/web/p/products/1657750
U2: library part AS7805ADTR-G1, "Integrated Circuit", Case/Package=TO-252-3, Dropout Voltage=2V, Manufacturer=Diodes, Manufacturer_Name="Diodes Inc.", Max Operating Temperature=125°C, Min Operating Temperature=-40°C, Mouser Part Number=621-AS7805ADTR-G1, Output Current=1A, Output Voltage=15V, Supplier Part Number 1=621-AS7815ADTR-G1, Datasheet Link=https://www.diodes.com/assets/Datasheets/AS78XXA.pdf, Height=2mm, Manufacturer_Part_Number=AS7805ADTR-G1, Manufacturer Part Number=AS7815ADTR-G1, Mount="Surface Mount", Mouser Price/Stock=https://www.mouser.com/Search/Refine.aspx?Keyword=621-AS7805ADTR-G1, Number of Regulators=1, Packaging="Tape and Reel", Pricing 1="1=0.43, 10=0.354, 50=0.354, 100=0.216, 1000=0.167, 10000=0.142 (USD)", Stock 1=1565, Supplier 1=Mouser
U4: library part CMP-1633-00148-1, "8-Line To 1-Line Data Selectors/Multiplexers, D0016A, LARGE T&R", F @ Nom Voltage(Max)(Mhz)=35, Generic Part Number=SN74LS151, ICC @ Nom Voltage(Max)(mA)=10, Manufacturer="Texas Instruments", Operating Temperature Range(C)="0 to 70", Rating=Catalog, tpd @ Nom Voltage(Max)(ns)=38, Voltage(Nom)(V)=5, Bits(#)=16, Channels(#)=1, Code_JEDEC="MS-012 variation AC", ComponentLink1Description="Manufacturer URL", ComponentLink1URL=http://www.ti.com/, ComponentLink2Description=Datasheet, ComponentLink2URL=http://www.ti.com/lit/ds/symlink/sn74ls151.pdf, ComponentLink3Description="Package Specification", ComponentLink3URL=http://www.ti.com/lit/ml/mpds178g/mpds178g.pdf, Configuration="\"16\",\"1\"", DatasheetVersion=SDLS054, Function=Encoder/Multiplexer, Input Type=TTL, Output Drive (IOL/IOH)(Max)(mA)=8/-0.4, Output Type=TTL, PackageReference=D0016A, PartNumber=SN74LS151DR, Schmitt Trigger=No, Technology Family=LS, Type=Standard, VCC(Max)(V)=5.25, VCC(Min)(V)=4.75
U5: library part ESP01, "ESP-01", DeviceSetName=ESP01, GateName_1=G$1, LibraryName=esp8266modules, Package=ESP01, SymbolName_1=ESP01
U6: library part CMP-2100-03657-1, "9-axis MotionTracking device, 2.4 to 3,6 V, -40 to 85 degC, 24-Pin QFN, RoHS, Tape and Reel", Case/Package=QFN, Manufacturer=InvenSense, Max Operating Temperature=85degC, Max Supply Voltage=3.6V, Min Operating Temperature=-40degC, Min Supply Voltage=2.4V, Package Description="24-Pin Quad Flat No-lead Package, Body 3 x 3 mm, Pitch 0.4 mm", Package Quantity=1, Package Reference=QFN-24, Datasheet URL=http://datasheet.octopart.com/MPU-9250-InvenSense-datasheet-21859386.pdf, Datasheet Version="Rev. 1.0, 01/2014", Height=1mm, Length=3.1mm, Manufacturer URL=http://www.invensense.com/, Mount=SurfaceMount, RoHSCompliant=true, Width=3.1mm
U7: library part CMP-0069-00282-2, "SIMPLE SWITCHER® Power Converter 150 KHz 3A Step-Down Voltage Regulator, 5-pin TO-263", Manufacturer="Texas Instruments", PackageTopMarking="NSUZXYTTE#*LM2596S*-5.0 P+", PowerWise=N, Code_JEDEC=MO-169-AB, ComponentLink1Description="LM2596 Datasheet", ComponentLink1URL=http://www.national.com/ds/LM/LM2596.pdf, ComponentLink2Description="LM2596 Web Page", ComponentLink2URL=http://www.national.com/pf/LM/LM2596.html, ComponentLink3Description="TS5B Package Page", ComponentLink3URL=http://www.national.com/packaging/folders/ts5b.html, CompType=Switcher, DatasheetVersion=May-2002, PackageDescription="TO-263, Molded, .400 x .390 x .180in, 5 Lead, .067in Pitch, Surface Mount", PackageReference=TS5B, PinCount=5, RevisionNote="Component URLs added", RoHS=N
U8: "Integrated Circuit", Manufacturer_Name="Diodes Inc.", Mouser Part Number=621-AS7805ADTR-G1, Datasheet Link=https://www.diodes.com/assets/Datasheets/AS78XXA.pdf, Height=2mm, Manufacturer_Part_Number=AS7805ADTR-G1, Mouser Price/Stock=https://www.mouser.com/Search/Refine.aspx?Keyword=621-AS7805ADTR-G1

## Free pads (board coordinates)
  round 1.524 hole 3: 2(74.295,59.944) 3(3.175,37.338) 4(22.606,5.461)

## Via types
v1: diameter 1.27, hole 0.642, Top Layer to Bottom Layer, 86 vias
v2: diameter 0.797, hole 0.4, Top Layer to Bottom Layer, 7 vias
v3: diameter 1.27, hole 0.711, Top Layer to Bottom Layer, 1 vias

## Nets (pads, with @x,y where several pads share a name; then routed paths per layer and width w, separated by ;. In a path a pad name is that pad's centre, name@x,y a point inside that pad or via, vN(x,y) a via of type N, cw(c..) or ccw(c..) an arc to the next point about the centre after c; other vN are vias at no path point)
0: "M DIR.6" "M ESQ.6" C1.1 C2.1 C3.1 C4.1 C5.1 C6.1 C7.1 C8.1 C9.1 C10.2 C11.1 C12.1 C13.1 C14.2 C15.1 C16.1 C17.1 C18.1 D1.2 DS1.2 DS2.2 DS3.2 ENCODER.7 ESC.6 ESC.7 P1.1 R16.1 R17.1 R18.1 R19.1 R20.1 RECEPTOR.2 U1.1 U2.2 U3.19 U3.20 U3.22 U4.7 U4.8 U5.GND U6.11 U6.18 U6.20 U7.3 U7.5 U8.2 | length 30.8
  Top Layer w0.178: U6.11 74.718,44.954 74.718,44.29 75.311,43.697 v2(75.311,43.561) ; U6.20 74.714,49.06 v2(75.057,49.403)
  Top Layer w0.4: ENCODER.7 40.62,35.429 41.529,36.338 v3@41.529,36.957 ; v1(43.307,25.146) 43.434,25.273 43.434,26.772 43.494,26.832 C7.1
  Bottom Layer w0.178: v2(75.057,49.403) 73.406,49.403 72.39,48.387 72.39,46.482 v2(75.311,43.561)
  Bottom Layer w0.4: v3(41.656,37.211) 41.656,33.147 39.497,30.988 39.497,29.083 43.307,25.273 v1(43.307,25.146)
3V3: "M DIR.2" "M ESQ.2" C1.2 C2.2 C10.1 C12.2 R7.2 U1.2 U5.CH_PD U5.RST U5.VCC U6.1 U6.8 U6.13 | length 302
  Top Layer w0.178: C12.2 72.552,53.432 76.43,49.554 76.43,45.49 ; U6.1 72.578,47.486 72.209,47.486 70.739,46.016 v2(70.739,44.323) 70.757,44.341 71.628,44.341 ; U6.8 73.51,44.954 73.51,44.585 73.266,44.341 71.628,44.341 ; U6.13 76.43,45.49 ; 71.628,44.341 71.628,43.053 74.168,40.513 76.248,40.513 77.003,41.268 77.003,44.917 76.43,45.49
  Top Layer w0.4: v1(0.762,30.226) 0.889,30.099 0.889,3.937 3.81,1.016 v1(27.813,1.016) 35.814,1.016 36.168,1.37 36.168,1.504 36.49,1.826 36.49,2.476 ; C2.2 C2.2@6.038,32.163 ; C1.2@7.941,32.163 C1.2 ; v1(29.464,11.049) 29.683,11.049 31.777,13.143 R7.2 ; v1(30.353,40.513) 30.393,40.474 32.346,40.474 C10.1 ; 36.511,2.455 36.511,1.826 36.511,1.335 37.084,0.762 52.07,0.762 52.771,1.463 52.771,2.487
  Top Layer w0.642: v1(0.762,30.226) 2.63,32.094 C2.2 ; C2.2@6.038,32.163 7.941,32.163 8.001,32.163 8.714,32.163 10.541,33.99 U1.2 ; v1(25.781,40.005) 29.675,40.005 30.183,40.513 v1(30.353,40.513) ; v1(31.877,38.1) 38.735,38.1 40.894,40.259 50.139,40.259 53.885,44.006 65.85,44.006 v1(66.675,44.831) ; 36.49,2.476 36.511,2.455 ; U5.VCC U5.RST U5.CH_PD 40.894,77.724 v1(42.037,77.724) ; 52.771,2.487 52.792,2.508
  Bottom Layer w0.178: v1(66.675,44.831) 67.183,44.323 v2(70.739,44.323)
  Bottom Layer w0.4: v1(27.813,1.016) 27.813,9.398 v1(29.464,11.049)
  Bottom Layer w0.642: v1(0.762,30.226) 16.002,30.226 v1(25.781,40.005) ; v1(31.877,38.1) 31.877,38.989 v1(30.353,40.513) 29.337,41.529 17.145,41.529 14.478,44.196 14.478,61.849 21.971,69.342 39.121,69.342 42.037,72.258 v1(42.037,77.724)
5V: C9.2 C14.1 C17.2 C18.2 ENCODER.1 ENCODER.4 ESC.3 L1.2 R2.1 R6.2 RECEPTOR.1 U3.23 U4.16 U7.4 U8.3 | length 156.2
  Top Layer w0.4: ESC.3 11.815,53.066 11.343,52.594 11.259,52.594 11.037,52.372 11.037,46.113 13.462,43.688 16.256,43.688 v1(16.637,44.069) ; C14.1@20.828,19.708 C14.1 20.828,22.208 21.578,22.958 23.771,22.958 25.189,24.376 R6.2 ; v1(21.59,44.069) 21.654,44.133 21.654,45.911 U3.23 ; ENCODER.1@33.139,35.227 33.139,32.774 34.417,31.496 38.862,31.496 ; ENCODER.4@36.81,34.798 ENCODER.4@36.81,35.306 ; ENCODER.4@37.07,34.979 ENCODER.4 36.87,33.488 38.862,31.496 ; RECEPTOR.1 RECEPTOR.1@51.237,38.93 ; v1(53.975,36.068) 53.975,35.376 55.153,34.198 55.153,32.604 ; U8.3 55.028,23.758 C18.2 55.028,28.223 55.153,28.348 C17.2 55.153,32.604 ; v1(59.817,39.497) 61.084,40.764 64.454,40.764 65.305,39.913 C9.2 65.505,39.913 66.421,38.997 U4.16 ; 38.862,31.496 40.005,31.496 41.967,33.458 41.967,34.601 42.926,35.56 42.926,36.83 45.466,39.37 50.797,39.37 RECEPTOR.1@51.237,38.93 ; RECEPTOR.1@51.237,38.93 51.237,36.52 55.153,32.604
  Top Layer w0.642: U7.4@8.685,13.97 8.685,15.797 9.987,17.099 18.22,17.099 C14.1@20.828,19.708 ; C14.1@20.828,22.208 20.828,24.13 25.932,29.234 L1.2 L1.2@25.932,34.143 ; v1(21.59,44.069) 21.59,43.646 19.346,41.402 R2.1 19.304,38.227 22.259,35.272 24.803,35.272 L1.2@25.932,34.143 ; v1(25.908,37.211) 25.932,37.187 L1.2@25.932,34.143 ; v1(29.845,35.941) 32.318,35.941 ENCODER.1@32.751,35.508 ; ENCODER.1@33.06,35.306 ENCODER.1@33.139,35.227
  Bottom Layer w0.4: v1(16.637,44.069) v1(21.59,44.069) ; v1(53.975,36.068) 53.975,36.449 57.023,39.497 v1(59.817,39.497)
  Bottom Layer w0.642: v1(25.908,37.211) 25.932,37.187 28.599,37.187 v1(29.845,35.941)
15V: "M DIR.4" "M ESQ.4" C7.2 C8.2 U2.3 | length 84.5
  Top Layer w0.4: v1(32.893,9.779) 32.893,8.636 v1(33.782,7.747) 34.49,7.039 34.49,2.476 ; v1(40.513,25.781) 40.513,27.615 U2.3 40.344,28.081 40.894,28.631 v1(40.894,29.845) ; C7.2 43.621,28.092 45.147,28.092 C8.2 45.262,28.157 46.736,29.631 v1(46.736,29.845) ; v1(50.673,8.509) 50.732,8.45 50.732,2.567 50.792,2.508
  Bottom Layer w0.4: v1(32.893,9.779) 32.893,13.624 36.668,17.399 40.386,17.399 41.311,16.474 41.311,15.085 43.569,12.827 46.248,12.827 46.482,13.061 46.482,19.812 v1(40.513,25.781) ; v1(33.782,7.747) 33.874,7.839 33.874,8.982 34.544,9.652 49.53,9.652 v1(50.673,8.509) ; v1(40.894,29.845) v1(46.736,29.845)
ARMA: ESC.2 U3.27 | length 24
  Top Layer w0.4: ESC.2 22.598,54.316 23.32,53.594 23.368,53.594 v1(23.495,53.467) ; v1(29.591,49.53) 29.591,48.26 U3.27
  Bottom Layer w0.4: v1(23.495,53.467) 25.654,53.467 v1(29.591,49.53)
BAT1S: R15.1 R20.2 U3.9 | length 3.5
  Top Layer w0.4: R20.2 U3.9 44.706,61.343 44.706,62.671 44.781,62.746 R15.1
BAT2S: R1.1 R14.1 R19.2 U3.8 | length 32.8
  Top Layer w0.4: v1(45.847,56.896) 45.847,58.623 46.686,59.462 46.77,59.462 47.067,59.759 R19.2 U3.8 47.117,61.512 47.627,62.022 47.627,62.671 47.702,62.746 R14.1 ; R1.1 62.341,66.725 63.333,67.717 63.333,68.413 v1(63.5,68.58)
  Bottom Layer w0.4: v1(45.847,56.896) 47.752,56.896 51.069,60.213 51.069,62.245 53.086,64.262 54.483,64.262 58.801,68.58 v1(63.5,68.58)
BAT3S: R13.1 R18.2 U3.7 | length 3.2
  Top Layer w0.4: R18.2 U3.7 R13.1
BAT4S: R12.1 R17.2 U3.6 | length 3.1
  Top Layer w0.4: R17.2 U3.6 52.261,61.278 52.261,62.809 R12.1
BAT5S: R11.1 R16.2 U3.5 | length 3
  Top Layer w0.4: R16.2 54.747,59.769 54.747,61.204 U3.5 54.747,61.224 54.747,62.736 R11.1
BP3V3: R8.2 R9.1 R10.2 U3.21 | length 21.7
  Top Layer w0.4: R8.2 16.388,56.15 17.034,56.15 v1(17.907,57.023) ; R10.2 R10.2@16.548,48.445 ; R9.1 18.377,51.493 ; U3.21 16.574,46.038 16.574,48.42 R10.2@16.548,48.445 ; v1(21.209,52.451) 20.251,51.493 18.377,51.493 ; R10.2@16.548,48.445 18.346,48.445 19.177,49.276 19.177,50.693 18.377,51.493
  Bottom Layer w0.4: v1(17.907,57.023) 19.05,57.023 21.209,54.864 v1(21.209,52.451)
"ENCODER D+": ENCODER.3 U3.29 | length 22.8
  Top Layer w0.4: v1(35.56,32.893) 35.56,35.119 ENCODER.3 ; v1(36.703,48.641) 36.83,48.514 36.83,46.101 U3.29
  Bottom Layer w0.4: v1@35.64,33.274 36.576,33.274 37.465,34.163 37.465,43.688 35.814,45.339 35.814,47.752 v1(36.703,48.641)
"ENCODER D-": ENCODER.2 U3.28 | length 11.8
  Top Layer w0.4: v1@34.27,36.957 v1(34.31,36.917) ENCODER.2@34.31,35.306 ; U3.28 34.417,45.676 33.782,45.041 33.782,44.212 34.925,43.069 v1(34.925,41.402)
  Bottom Layer w0.4: v1@34.33,36.79 34.33,40.807 v1(34.925,41.402)
"ENCODER E+": ENCODER.6 U3.31 | length 28
  Top Layer w0.4: ENCODER.6 39.37,36.977 41.255,38.862 v1(42.926,38.862) ; U3.31 41.783,46.228 41.783,49.276 43.688,51.181 v1(45.339,51.181)
  Bottom Layer w0.4: v1(42.926,38.862) 42.856,38.932 42.856,47.659 42.421,48.095 42.421,48.933 44.669,51.181 v1(45.339,51.181)
"ENCODER E-": ENCODER.5 U3.30 | length 15.9